# Altium PCB STM32 PCB.PcbDoc (part 2 of 2)
Units mm, origin at the board's own origin, x right, y up, seen from the top; angles counter-clockwise.
Board outline 53.53 x 23.03 mm, 2 copper layers (Top Layer, Bottom Layer); 33 components, 50 nets, 169 pads, 215 vias.
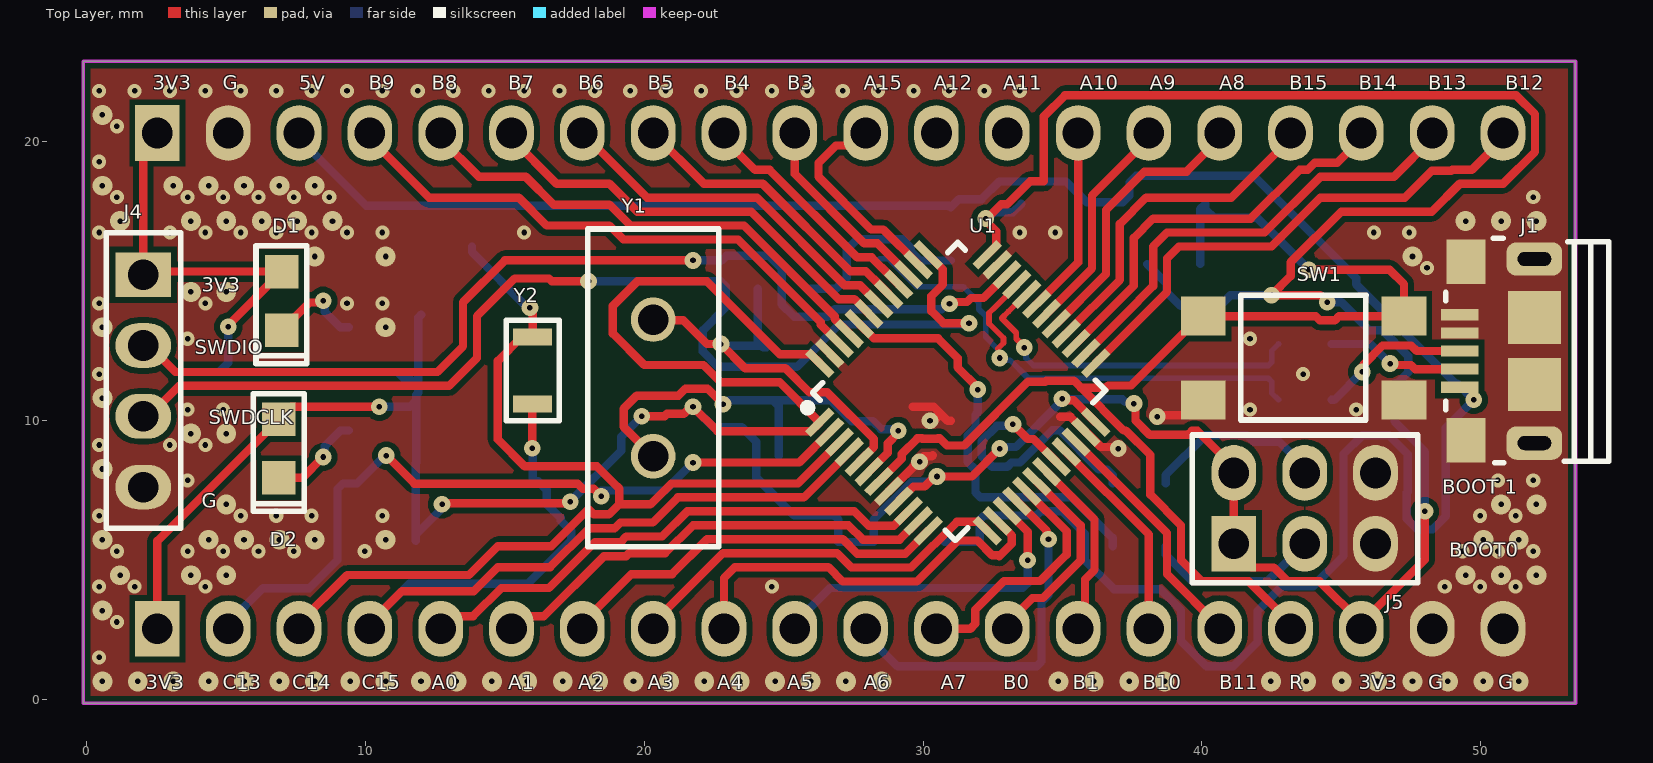
[diagram p0: Top Layer view]

## Via types
v1: diameter 0.508, hole 0.2, Top Layer to Bottom Layer, 93 vias
v2: diameter 0.711, hole 0.2, Top Layer to Bottom Layer, 80 vias
v3: diameter 0.6, hole 0.2, Top Layer to Bottom Layer, tented both sides, 37 vias
v4: diameter 0.6/0.6 (per signal layer), hole 0.2, Top Layer to Bottom Layer, tented both sides, 3 vias
v5: diameter 0.6, hole 0.2, Top Layer to Bottom Layer, 2 vias

## Nets (pads, with @x,y where several pads share a name; then routed paths per layer and width w, separated by ;. In a path a pad name is that pad's centre, name@x,y a point inside that pad or via, vN(x,y) a via of type N, cw(c..) or ccw(c..) an arc to the next point about the centre after c; other vN are vias at no path point) (continued)
PB11: J3.16 U1.22 | length 8.8
  Top Layer w0.3: U1.22 38.75,5.974 38.75,4.5 40.64,2.61 J3.16
PB12: J2.20 U1.25 | length 18.8
  Top Layer w0.3: U1.25 36.513,12.383 38.75,14.62 38.75,15.824 39.176,16.25 42.5,16.25 44.25,18 47.28,18 48.25,18.97 48.95,18.97 48.98,19 49.68,19 50.8,20.12 J2.20
PB13: J2.19 U1.26 | length 16.6
  Top Layer w0.3: U1.26 37.205,13.782 38.25,14.827 38.25,16.25 38.75,16.75 42.25,16.75 44.25,18.75 46.89,18.75 48.26,20.12 J2.19
PB14: J2.18 U1.27 | length 14.5
  Top Layer w0.3: U1.27 37.56,14.844 37.56,16.56 38.25,17.25 41.75,17.25 43.5,19 43.793,19 44.043,19.25 44.85,19.25 45.72,20.12 J2.18
PB15: J2.17 U1.28 | length 12.3
  Top Layer w0.3: U1.28 37.06,15.051 37.06,17.06 38,18 41.06,18 43.18,20.12 J2.17
PC13: J3.2 R7.1 U1.2 | length 27.4
  Top Layer w0.3: v3(10.75,8.75) 11.756,7.744 17.613,7.744 17.799,7.557 18.193,7.557 18.25,7.5 v3(18.46,7.29) ; v3(21.75,8.5) 25.559,8.5 U1.2
  Bottom Layer w0.3: J3.2 5.08,2.74 6.334,3.994 7.994,3.994 9,5 9,7.55 9.2,7.75 R7.1 9.7,7.75 10.7,8.75 v3(10.75,8.75) ; v3(18.46,7.29) 18.46,7.5 20.75,7.5 v3(21.75,8.5)
SWCLK: J4.3 U1.37 | length 41
  Top Layer w0.3: J4.3 2.232,10.16 3.322,11.25 13,11.25 14,12.25 14,13.75 15.35,15.1 16.584,15.1 16.684,15 v3(18,15) ; U1.37 30.711,15.427 30.711,14.885 30.3,14.473 30.3,13.93 30.73,13.5 v3(31.648,13.5)
  Bottom Layer w0.3: v3(18,15) 22.742,15 22.918,14.824 22.918,14.061 22.1,13.244 22.1,12.481 22.647,11.934 25.473,11.934 26.989,13.45 31.598,13.45 v3(31.648,13.5)
SWDIO: J4.2 U1.34 | length 36.3
  Top Layer w0.3: J4.2 2.232,12.7 3.182,11.75 12.584,11.75 13.5,12.666 13.5,14.25 15,15.75 v3(21.75,15.75) ; v3(30.95,14.2) 31.007,14.257 31.578,14.257 31.721,14.4 32.166,14.4 U1.34
  Bottom Layer w0.3: v3(21.75,15.75) 22.785,15.75 22.946,15.911 24.485,15.911 24.929,15.467 24.929,14.177 25.374,13.732 26.564,13.732 26.832,14 30.669,14 30.868,14.2 v3(30.95,14.2)
XTAL_A: C8.2 R9.1 U1.5 Y1.1 | length 14.7
  Top Layer w0.3: Y1.1 20.338,13.608 21.394,13.608 22.252,12.75 v3(22.75,12.75) 23.617,11.883 25.063,11.883 25.927,11.019 26.563,11.019 28.237,9.346 28.237,9.056 U1.5
  Bottom Layer w0.3: v3(22.75,12.75) 22.807,12.693 R9.1@24.21,12.693 ; C8.2 24.069,12.834 R9.1@24.21,12.693 ; R9.1@24.21,12.693 24.325,12.693 R9.1 24.269,12.634 R9.1@24.21,12.693
XTAL_B: C9.2 R9.2 U1.6 Y1.2 | length 17
  Top Layer w0.3: Y1.2 19.265,9.781 19.265,10.435 19.731,10.9 21.231,10.9 21.481,11.15 22.269,11.15 v3(22.826,10.594) ; U1.6 28.726,8.839 28.737,8.849 28.737,9.192 29.107,9.562 v3(29.107,9.643)
  Bottom Layer w0.3: v3(22.826,10.594) 22.907,10.594 23.047,10.734 R9.2@24.623,10.734 ; C9.2 24.823,10.534 R9.2@24.623,10.734 ; v3(29.107,9.643) 29.049,9.701 28.487,9.701 28.207,9.982 27.444,9.982 26.692,10.734 R9.2@24.623,10.734
XTAL_C: C10.2 J3.3 U1.3 Y2.1 | length 36.6
  Top Layer w0.3: J3.3 7.62,2.74 9.347,4.467 13.717,4.467 14.75,5.5 16.669,5.5 18,6.831 18.19,6.64 18.729,6.64 19.11,7.021 19.11,7.56 18.9,7.769 18.306,8.363 15.714,8.363 14.75,9.327 14.75,12.15 15.6,13 Y2.1 v3@16,14 ; 19.088,7 20.22,7 20.97,7.75 25.516,7.75 U1.3
  Bottom Layer w0.3: C10.2 13.823,16.05 15.823,14.05 v3(15.9,14.05)
XTAL_D: C12.2 J3.4 U1.4 Y2.2 | length 34.2
  Top Layer w0.3: J3.4 10.16,2.74 11.31,3.89 13.89,3.89 14.75,4.75 16.626,4.75 18.017,6.14 18.936,6.14 19.146,6.35 20.307,6.35 21.207,7.25 25.723,7.25 U1.4 ; v3(15.983,9.013) 15.983,10.583 Y2.2
  Bottom Layer w0.3: J3.4 10.16,2.74 11.578,4.158 15.83,4.158 17.377,5.705 17.377,6.046 17,6.423 17,6.518 16.5,7.018 16.5,7.523 16.2,7.823 C12.2 16,8.997 v3(15.983,9.013)

## Polygon pours and split planes (outlines as drawn)
GND on Bottom Layer "GND_L02_P001" (solid, remove dead copper, pour order 1): -0.127,22.9 -0.127,-0.127 52.863,-0.127 53.4,0.41 53.4,22.9
GND on Top Layer "GND_L01_P000" (solid, remove dead copper, pour order 0): -0.127,22.9 -0.127,-0.127 53.4,-0.127 53.4,22.9

## Keep-outs
Keep-Out Layer:
  the board outline again, w0.127

## Silkscreen, mask and mechanical layers (free items; w line width, h text height)
Top Overlay:
  text "3V3" at 2.377,21.877 h0.51
  text "G" at 4.877,21.877 h0.51
  text "5V" at 7.627,21.877 h0.51
  text "B9" at 10.127,21.877 h0.51
  text "B8" at 12.377,21.877 h0.51
  text "B7" at 15.127,21.877 h0.51
  text "B6" at 17.627,21.877 h0.51
  text "B5" at 20.127,21.877 h0.51
  text "B4" at 22.877,21.877 h0.51
  text "B3" at 25.127,21.877 h0.51
  text "A15" at 27.877,21.877 h0.51
  text "A12" at 30.377,21.877 h0.51
  text "A11" at 32.877,21.877 h0.51
  text "A10" at 35.627,21.877 h0.51
  text "A9" at 38.127,21.877 h0.51
  text "A8" at 40.627,21.877 h0.51
  text "B15" at 43.127,21.877 h0.51
  text "B14" at 45.627,21.877 h0.51
  text "B13" at 48.127,21.877 h0.51
  text "B12" at 50.877,21.877 h0.51
  text "3V3" at 4.127,14.627 h0.51
  text "SWDIO" at 3.877,12.377 h0.51
  text "SWDCLK" at 4.377,9.877 h0.51
  text "BOOT 1" at 48.627,7.377 h0.51
  text "G" at 4.127,6.877 h0.51
  text "BOOT0" at 48.877,5.127 h0.51
  text "3V3" at 2.127,0.377 h0.51
  text "C13" at 4.877,0.377 h0.51
  text "C14" at 7.377,0.377 h0.51
  text "C15" at 9.877,0.377 h0.51
  text "A0" at 12.377,0.377 h0.51
  text "A1" at 15.127,0.377 h0.51
  text "A2" at 17.627,0.377 h0.51
  text "A3" at 20.127,0.377 h0.51
  text "A4" at 22.627,0.377 h0.51
  text "A5" at 25.127,0.377 h0.51
  text "A6" at 27.877,0.377 h0.51
  text "A7" at 30.627,0.377 h0.51
  text "B0" at 32.877,0.377 h0.51
  text "B1" at 35.377,0.377 h0.51
  text "B10" at 37.877,0.377 h0.51
  text "B11" at 40.627,0.377 h0.51
  text "R" at 43.127,0.377 h0.51
  text "3V3" at 45.627,0.377 h0.51
  text "G" at 48.127,0.377 h0.51
  text "G" at 50.627,0.377 h0.51

## Text inside footprints (layer, text, board x,y; h text height)
J2: Mechanical 1 "1" at 2.496,18.246 h1.52 r90
J3: Mechanical 1 "1" at 3.286,0.486 h1.52 r90
J4: Mechanical 1 "1" at 3.986,14.394 h1.52